# EAGLE board PCB_v186 (EAGLE 9.7.0)
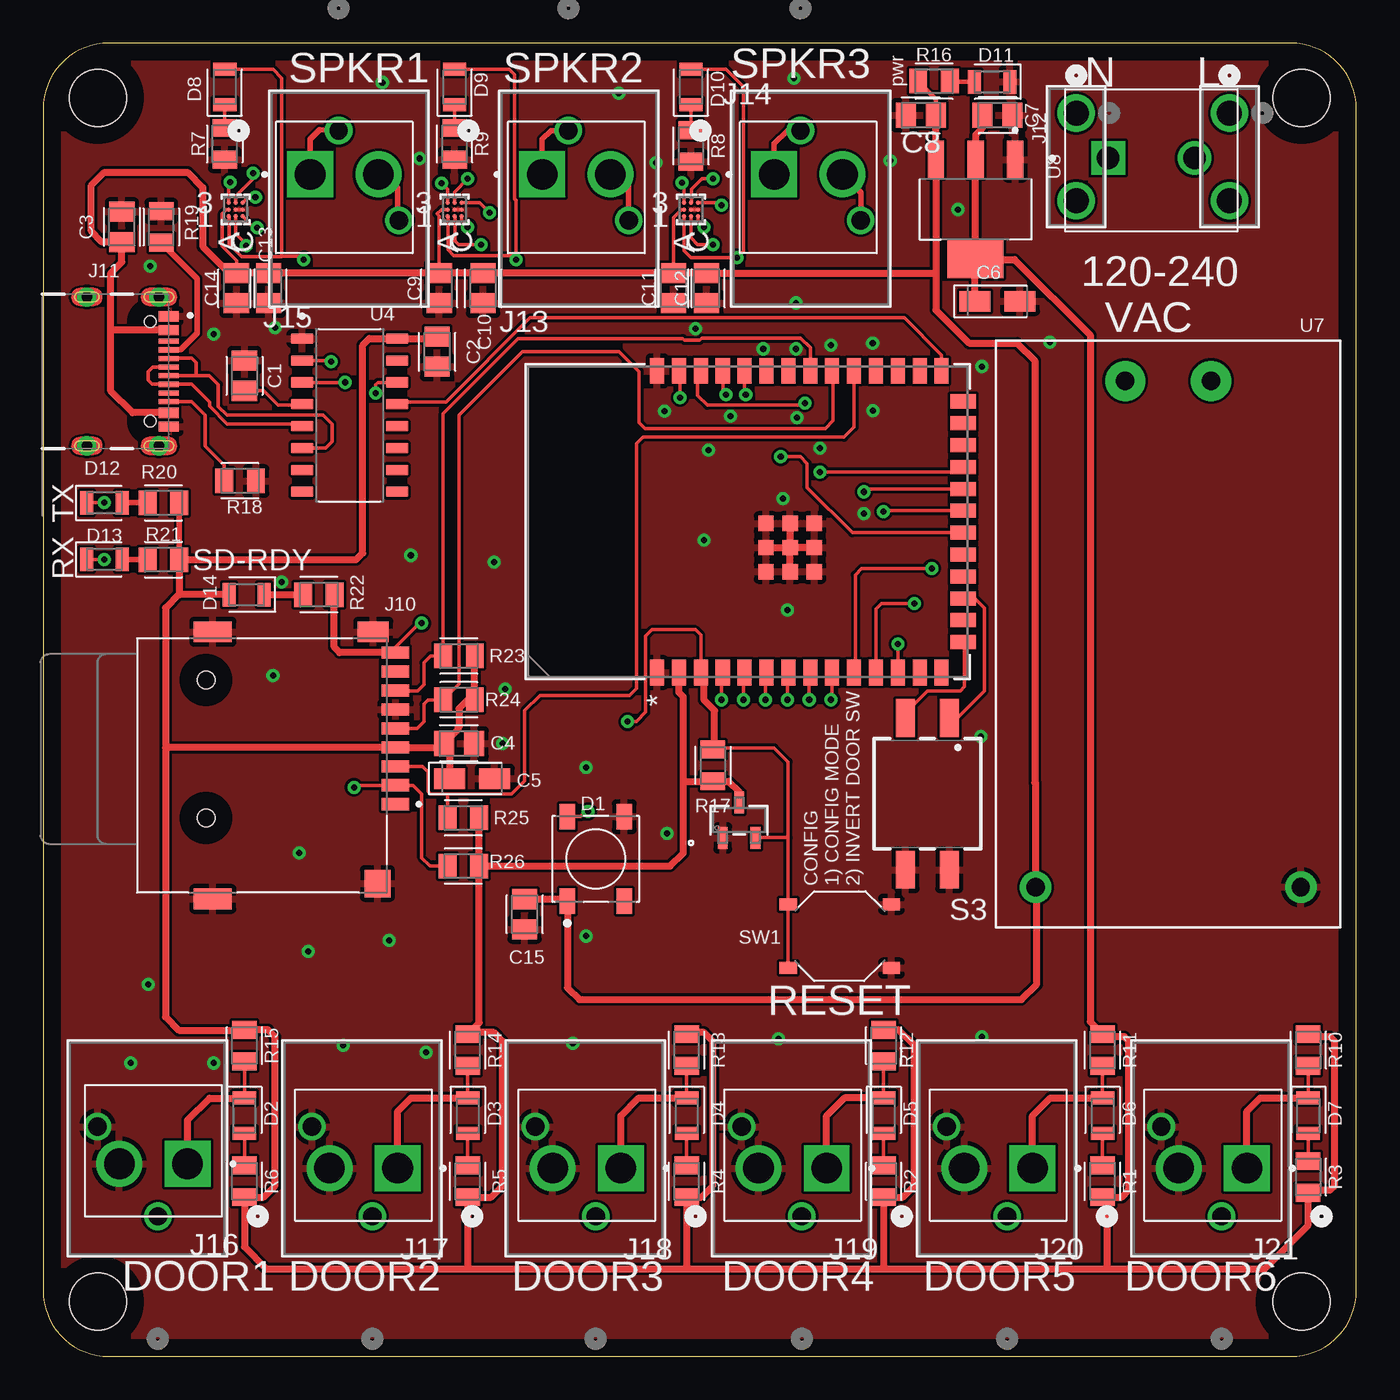
[diagram p0: board, top side]
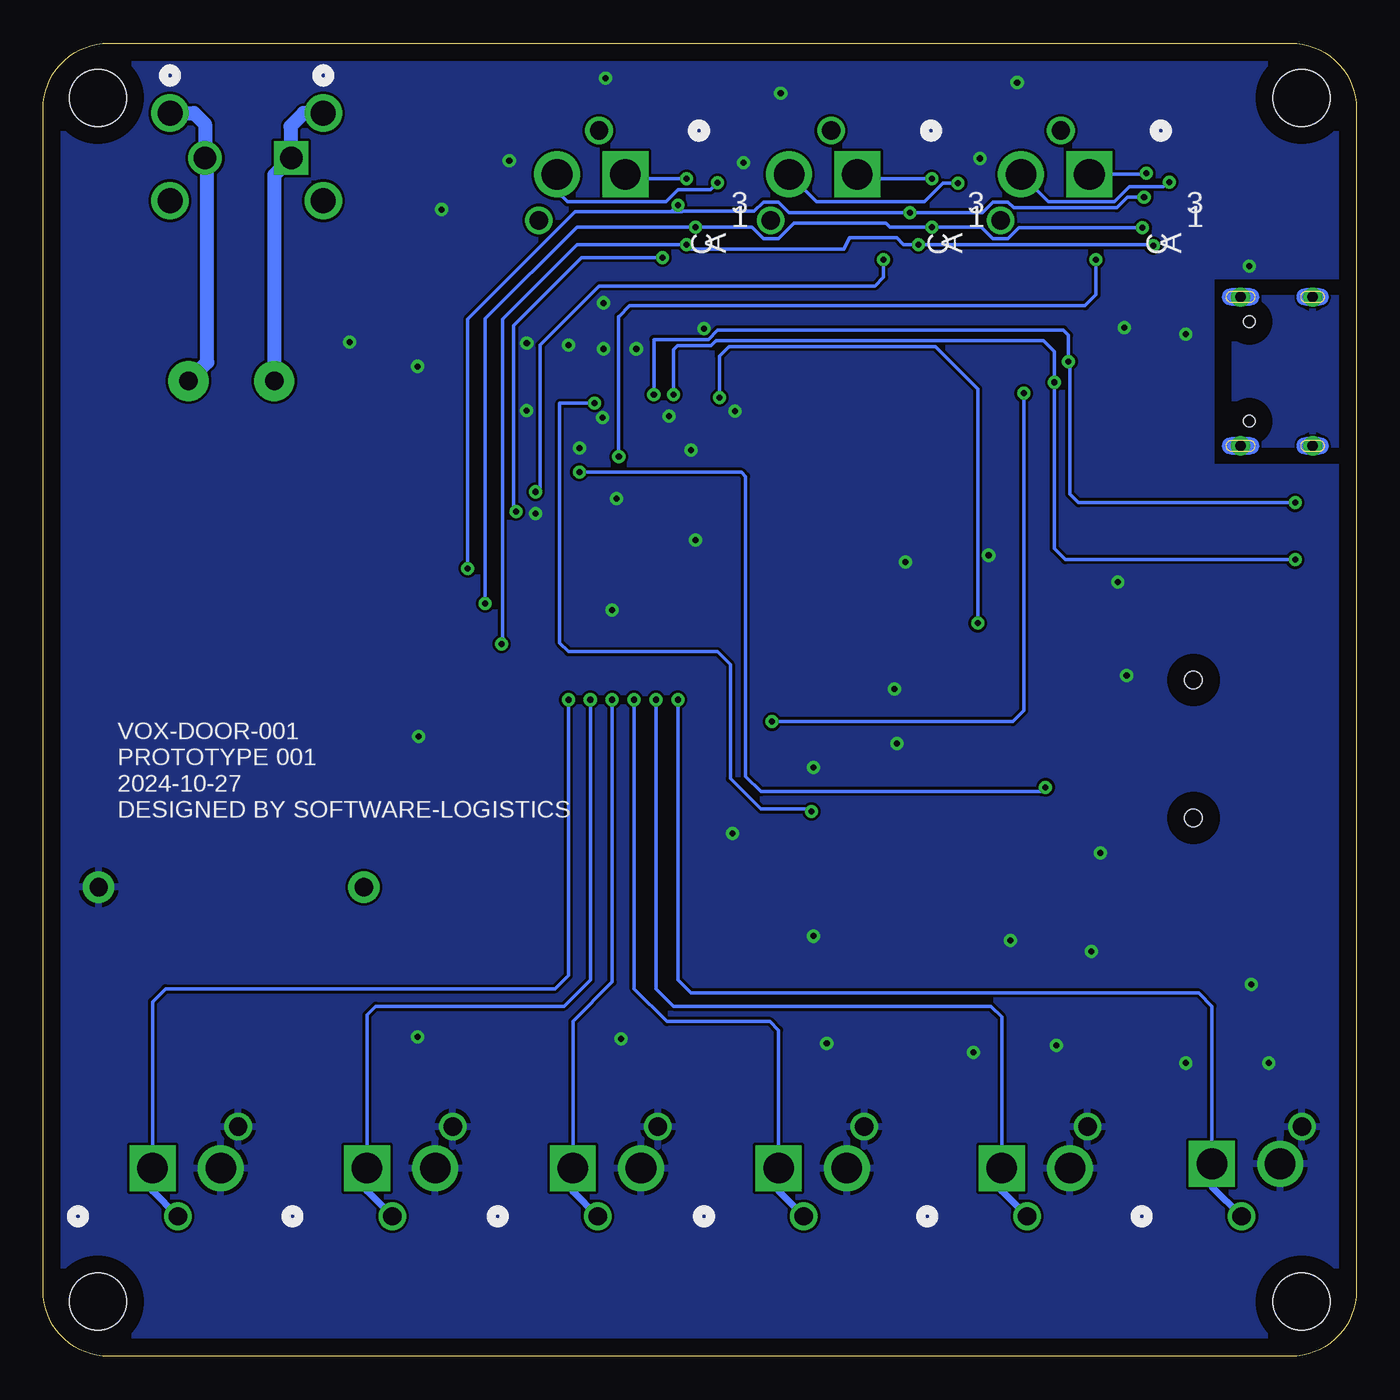
[diagram p1: board, bottom side, seen from below]

Size 76.2 x 76.2 mm. Coordinates in mm from the lower left corner, seen from the top.
Outline: 72.39,76.2 3.81,76.2 arc90 0,72.39 0,3.81 arc90 3.81,0 72.39,0 arc90 76.2,3.81 76.2,72.39 arc90 72.39,76.2
Copper layers (1*16): Top 0.035mm / dielectric 1.5mm / Bottom 0.035mm
Design rules "Fusion Electronics Design Rules": minimum track width 6mil, minimum drill 0.35mm, track to track 6mil, track to pad 6mil, pad to pad 6mil, via to via 6mil, smd to smd 0mil, copper to edge 40mil, drill to drill 6mil, minimum pad ring 10mil, minimum via ring 8mil, stop-mask expansion 4mil, vias tented up to drill 0mil, thermal gap 10mil
Holes 3.3 mm at 3.17,3.17 3.17,73.03 73.03,73.03 73.03,3.17

## Footprints (pad centres in the part's own frame; a part is rotated, then mirrored left to right if it is on the bottom)
CAPC2012X110 = smd 1.165 x 1.465: 1 -0.875,0; 2 0.875,0
CAPMP3216X180N = smd 1.796 x 1.189: 1 -1.31,0; 2 1.31,0
WS2812B = smd 1.5 x 0.9: 1 -2.45,1.65; 2 -2.45,-1.65; 3 2.45,-1.65; 4 2.45,1.65
LEDC2012X110N_FLAT-B = smd 0.762 x 1.362: A 1.025,0; C -1.025,0
LEDC2012X110N_FLAT-R = smd 0.762 x 1.362: A 1.025,0; C -1.025,0
CONN2_1-2834011-2_TEC = drill 1.067 pad 1.575: 1 0,0; 2 3.5,-5.2
CUI_MSD-4-A = smd 0.7 x 1.6: 1 2.25,7.75; 2 1.15,7.75; 3 0.05,7.75; 4 -1.05,7.75; 5 -2.15,7.75; 6 -3.25,7.75; 7 -4.35,7.75; 8 -5.45,7.75; CD -6.55,7.75 | smd 1.2 x 1.8: G1 -7.75,6.45 | smd 1.6 x 1.5: G2 6.85,6.7 | smd 1.2 x 2.2: G3 -7.75,-2.85; G4 7.75,-2.85 | hole 1: -4.95,-3.25; 3.05,-3.25
GCT_USB4105-GF-A = smd 0.6 x 1.15: A1_B12 -3.2,4.755; A4_B9 -2.4,4.755; B1_A12 3.2,4.755; B4_A9 2.4,4.755 | smd 0.3 x 1.15: A5 -1.25,4.755; A6 -0.25,4.755; A7 0.25,4.755; A8 1.25,4.755; B5 1.75,4.755; B6 0.75,4.755; B7 -0.75,4.755; B8 -1.75,4.755 | drill 0.6 pad 1: SH1 -4.32,4.18; SH2 4.32,4.18; SH3 -4.32,0; SH4 4.32,0 | hole 0.65: 2.89,3.68; -2.89,3.68
PHOENIX_1935161 = drill 1.3 square: 1 2.5,4.25 | drill 1.3: 2 7.5,4.25
TE_640445-2 = drill 1.778 pad 2.128 square: 1 0,0 | drill 1.778 pad 2.128: 2 3.96,0
CONN_1217861-1_TEC = drill 1.448 pad 1.956: 1 0,0; 2 5.08,0
RESC2012X65 = smd 1.031 x 1.42: 1 -0.919,0; 2 0.919,0
418121270802 = smd 1.1 x 2.2: 1 -1.27,-4.4; 2 1.27,-4.4; A1 -1.27,4.4; A2 1.27,4.4
SW4-SMD-5.2X5.2X1.5MM = smd 1 x 0.7: 1 -3,1.85; 2 3,1.85; 3 -3,-1.85; 4 3,-1.85
21-0896B_9_MXM = smd 0.254 x 0.254: A1 -0.4,0.4; A2 0,0.4; A3 0.4,0.4; B1 -0.4,0; B2 0,0; B3 0.4,0; C1 -0.4,-0.4; C2 0,-0.4; C3 0.4,-0.4
ESP32-S3-WROOM-1_EXP = smd 1.499 x 0.813: 1 -8.75,5.26; 2 -8.75,3.99; 3 -8.75,2.72; 4 -8.75,1.45; 5 -8.75,0.18; 6 -8.75,-1.09; 7 -8.75,-2.36; 8 -8.75,-3.63; 9 -8.75,-4.9; 10 -8.75,-6.17; 11 -8.75,-7.44; 12 -8.75,-8.71; 13 -8.75,-9.98; 14 -8.75,-11.25; 27 8.75,-11.25; 28 8.75,-9.98; 29 8.75,-8.71; 30 8.75,-7.44; 31 8.75,-6.17; 32 8.75,-4.9; 33 8.75,-3.63; 34 8.75,-2.36; 35 8.75,-1.09; 36 8.75,0.18; 37 8.75,1.45; 38 8.75,2.72; 39 8.75,3.99; 40 8.75,5.26 | smd 0.813 x 1.499: 15 -6.985,-12.5; 16 -5.715,-12.5; 17 -4.445,-12.5; 18 -3.175,-12.5; 19 -1.905,-12.5; 20 -0.635,-12.5; 21 0.635,-12.5; 22 1.905,-12.5; 23 3.175,-12.5; 24 4.445,-12.5; 25 5.715,-12.5; 26 6.985,-12.5 | smd 0.889 x 0.889: 41 -1.5,-2.46; 42 -2.9,-1.06; 43 -2.9,-2.46; 44 -2.9,-3.86; 45 -1.5,-3.86; 46 -0.1,-3.86; 47 -0.1,-2.46; 48 -0.1,-1.06; 49 -1.5,-1.06
21-0051H_MXM = smd 0.559 x 1.295: 1 -0.95,-1.029; 2 0.95,-1.029; 3 0,1.029
SOIC127P600X180-16N = smd 1.31 x 0.62: 1 -2.75,4.445; 2 -2.75,3.175; 3 -2.75,1.905; 4 -2.75,0.635; 5 -2.75,-0.635; 6 -2.75,-1.905; 7 -2.75,-3.175; 8 -2.75,-4.445; 9 2.75,-4.445; 10 2.75,-3.175; 11 2.75,-1.905; 12 2.75,-0.635; 13 2.75,0.635; 14 2.75,1.905; 15 2.75,3.175; 16 2.75,4.445
HLK-PM = drill 1.067 pad 2.337: AC-L -14.681,2.489; AC-N -14.681,-2.489 | drill 1.067 pad 1.829: DC+ 14.681,-7.696; DC- 14.681,7.696
VREG_TLV1117LV33DCYR = smd 2.15 x 0.95: 1 -2.9,2.3; 2 -2.9,0; 3 -2.9,-2.3 | smd 2.15 x 3.25: 4 2.9,0

## Placement (x,y rotation side)
C1  10nF  [CAPC2012X110]  11.68,56.9 90 top
C2  0.1uF  [CAPC2012X110]  22.86,58.29 270 top
C3  0.1uF  [CAPC2012X110]  4.57,65.53 90 top
C4  0.1uF  [CAPC2012X110]  24.13,35.56 0 top
C5  10uF  [CAPMP3216X180N]  24.89,33.53 0 top
C6  10uF  [CAPMP3216X180N]  55.37,61.21 0 top
C7  0.1uF  [CAPC2012X110]  55.37,72.01 0 top
C8  0.1uf  [CAPC2012X110]  50.93,72.01 180 top
C9  0.1uF  [CAPC2012X110]  22.99,61.98 270 top
C10  10uF  [CAPC2012X110]  25.53,61.98 270 top
C11  10uF  [CAPC2012X110]  36.58,61.98 270 top
C12  0.1uF  [CAPC2012X110]  38.49,61.98 270 top
C13  0.1uF  [CAPC2012X110]  13.08,61.98 270 top
C14  10uF  [CAPC2012X110]  11.22,61.98 270 top
C15  0.1uF  [CAPC2012X110]  27.94,25.65 270 top
D1  WS2812B  [WS2812B]  32.07,28.87 90 top
D2  LED_GREEN  [LEDC2012X110N_FLAT-B]  11.68,13.97 270 top
D3  LED_GREEN  [LEDC2012X110N_FLAT-B]  24.64,13.97 270 top
D4  LED_GREEN  [LEDC2012X110N_FLAT-B]  37.34,13.97 270 top
D5  LED_GREEN  [LEDC2012X110N_FLAT-B]  48.77,13.97 270 top
D6  LED_GREEN  [LEDC2012X110N_FLAT-B]  61.47,13.97 270 top
D7  LED_GREEN  [LEDC2012X110N_FLAT-B]  73.41,13.97 270 top
D8  LED_BLUE  [LEDC2012X110N_FLAT-B]  10.54,73.66 90 top
D9  LED_BLUE  [LEDC2012X110N_FLAT-B]  23.88,73.66 90 top
D10  LED_BLUE  [LEDC2012X110N_FLAT-B]  37.59,73.66 90 top
D11  LED_RED  [LEDC2012X110N_FLAT-R]  55.06,73.96 180 top
D12  LED_BLUE  [LEDC2012X110N_FLAT-B]  3.56,49.53 0 top
D13  LED_BLUE  [LEDC2012X110N_FLAT-B]  3.56,46.25 0 top
D14  LED_BLUE  [LEDC2012X110N_FLAT-B]  11.81,44.2 180 top
J1  1-2834011-2CONN2_1-2834011-2_TEC  [CONN2_1-2834011-2_TEC]  6.66,8.13 180 top
J2  1-2834011-2CONN2_1-2834011-2_TEC  [CONN2_1-2834011-2_TEC]  19.1,8.13 180 top
J3  1-2834011-2CONN2_1-2834011-2_TEC  [CONN2_1-2834011-2_TEC]  32.06,8.13 180 top
J4  1-2834011-2CONN2_1-2834011-2_TEC  [CONN2_1-2834011-2_TEC]  44.02,8.13 180 top
J5  1-2834011-2CONN2_1-2834011-2_TEC  [CONN2_1-2834011-2_TEC]  55.93,8.13 180 top
J6  1-2834011-2CONN2_1-2834011-2_TEC  [CONN2_1-2834011-2_TEC]  68.38,8.13 180 top
J7  1-2834011-2CONN2_1-2834011-2_TEC  [CONN2_1-2834011-2_TEC]  17.14,71.12 0 top
J8  1-2834011-2CONN2_1-2834011-2_TEC  [CONN2_1-2834011-2_TEC]  30.48,71.12 0 top
J9  1-2834011-2CONN2_1-2834011-2_TEC  [CONN2_1-2834011-2_TEC]  43.94,71.12 0 top
J10  MSD-4-A  [CUI_MSD-4-A]  12.7,34.29 270 top
J11  USB4105-GF-A  [GCT_USB4105-GF-A]  2.54,57.15 270 top
J12  1935161  [PHOENIX_1935161]  59.3,65.28 0 top
J13  CONN2-0.1  [TE_640445-2]  28.96,68.58 0 top
J14  CONN2-0.1  [TE_640445-2]  42.42,68.58 0 top
J15  CONN2-0.1  [TE_640445-2]  15.49,68.58 0 top
J16  CONN2-0.1  [TE_640445-2]  8.38,11.18 180 top
J17  CONN2-0.1  [TE_640445-2]  20.57,10.92 180 top
J18  CONN2-0.1  [TE_640445-2]  33.53,10.92 180 top
J19  CONN2-0.1  [TE_640445-2]  45.47,10.92 180 top
J20  CONN2-0.1  [TE_640445-2]  57.4,10.92 180 top
J21  CONN2-0.1  [TE_640445-2]  69.85,10.92 180 top
J22  1217861-1CONN_1217861-1_TEC  [CONN_1217861-1_TEC]  68.83,72.14 270 top
J23  1217861-1CONN_1217861-1_TEC  [CONN_1217861-1_TEC]  59.94,72.14 270 top
R1  470  [RESC2012X65]  61.47,10.16 270 top
R2  470  [RESC2012X65]  48.77,10.16 270 top
R3  470  [RESC2012X65]  73.41,10.41 270 top
R4  470  [RESC2012X65]  37.34,10.16 270 top
R5  470  [RESC2012X65]  24.64,10.16 270 top
R6  470  [RESC2012X65]  11.68,10.16 270 top
R7  470  [RESC2012X65]  10.54,70.36 90 top
R8  470  [RESC2012X65]  37.59,70.23 270 top
R9  470  [RESC2012X65]  23.88,70.36 270 top
R10  10K  [RESC2012X65]  73.41,17.78 270 top
R11  10K  [RESC2012X65]  61.47,17.78 270 top
R12  10K  [RESC2012X65]  48.77,18.03 270 top
R13  10K  [RESC2012X65]  37.34,17.78 270 top
R14  10K  [RESC2012X65]  24.64,17.78 270 top
R15  10K  [RESC2012X65]  11.68,18.03 270 top
R16  470  [RESC2012X65]  51.69,73.99 0 top
R17  10K  [RESC2012X65]  38.86,34.29 90 top
R18  5.1K  [RESC2012X65]  11.43,50.8 0 top
R19  5.1K  [RESC2012X65]  6.86,65.53 90 top
R20  470  [RESC2012X65]  6.99,49.53 180 top
R21  470  [RESC2012X65]  6.99,46.23 180 top
R22  470  [RESC2012X65]  16,44.2 0 top
R23  10K  [RESC2012X65]  24.13,40.64 0 top
R24  10K  [RESC2012X65]  24.13,38.1 0 top
R25  10K  [RESC2012X65]  24.38,31.24 0 top
R26  10K  [RESC2012X65]  24.38,28.45 0 top
S3  DIP-SW-2  [418121270802]  51.31,32.64 180 top
SW1  SMD-BUTTON(4P-5.2X5.2X1.5MM-SKQGADE010)-SKQGADE010  [SW4-SMD-5.2X5.2X1.5MM]  46.23,24.38 180 top
U1  MAX98357BEWL+T21-0896B_9_MXM  [21-0896B_9_MXM]  11.18,66.55 90 top
U2  ESP32-S3-WROOM-1-N4R8ESP32-S3-WROOM-1_EXP  [ESP32-S3-WROOM-1_EXP]  40.88,48.43 90 top
U3  MAX809SEUR+T21-0051H_MXM  [21-0051H_MXM]  40.39,31.11 0 top
U4  CH340C  [SOIC127P600X180-16N]  17.78,54.61 0 top
U5  MAX98357BEWL+T21-0896B_9_MXM  [21-0896B_9_MXM]  23.88,66.55 90 top
U6  MAX98357BEWL+T21-0896B_9_MXM  [21-0896B_9_MXM]  37.59,66.55 90 top
U7  HLK-PM  [HLK-PM]  65.28,41.91 270 top
U8  TLV1117LV33DCYR  [VREG_TLV1117LV33DCYR]  54.1,66.55 270 top

## Library data of the parts
C1 = Tinkercad; CATEGORY: Capacitor; COST: 0.0105; DIGIKEY: https://www.digikey.com/en/products/detail/murata-electronics/GRM155R71C103KA01D/587215
C2-C4 C7-C9 C12 C13 C15 = Tinkercad; CATEGORY: Capacitor; COST: 0.0125; DIGIKEY: https://www.digikey.com/en/products/detail/samsung-electro-mechanics/CL05B104KP5NNNC/3886660
C5 C6 = Capacitor; CATEGORY: Capacitor; COST: 0.176; DIGIKEY: https://www.digikey.com/en/products/detail/kemet/T491A106M010AT/818547
C10 C11 C14 = Tinkercad; CATEGORY: Capacitor; COST: 0.03; DIGIKEY: https://www.digikey.com/en/products/detail/samsung-electro-mechanics/CL21A106KOQNNNE/3886754
D1 = LED; CATEGORY: LED; COLOR: RGB; COST: 0.6; DESCRIPTION: LED integrated light source; DIGIKEY: https://www.digikey.com/en/products/detail/sparkfun-electronics/COM-16347/11630204; MANUFACTURER: Worldsemi; MPN: WS2812B; OPERATING_TEMP: -25 ℃ to +80℃(TJ); PART_STATUS: Active; SUB_CATEGORY: RGB
D2-D10 D12-D14 = LED; CATEGORY: LED; COLOR: BLUE; COST: 0.08; DESCRIPTION: CHIP LED FLAT; DIGIKEY: https://www.digikey.com/en/products/detail/liteon/LTST-C171TBKT/388528; SUB-CATEGORY: CHIP; TYPE: FLAT_TOP
D11 = LED; CATEGORY: LED; COLOR: RED; COST: 0.12; DESCRIPTION: CHIP LED FLAT; DIGIKEY: https://www.digikey.com/en/products/detail/w%C3%BCrth-elektronik/150060SS75000/4489903; SUB-CATEGORY: CHIP; TYPE: FLAT_TOP
J1 J2 J5-J9 = conn2-spring; COPYRIGHT: Copyright (C) 2024 Ultra Librarian. All rights reserved.; COST: 0.2352; DIGIKEY: https://www.digikey.com/en/products/detail/te-connectivity-amp-connectors/1-2834011-2/5872964; MANUFACTURER_PART_NUMBER: 1-2834011-2; MFR_NAME: TE Connectivity
J3 J4 = conn2-spring; COPYRIGHT: Copyright (C) 2024 Ultra Librarian. All rights reserved.; COST: 0.23520; DIGIKEY: https://www.digikey.com/en/products/detail/te-connectivity-amp-connectors/1-2834011-2/5872964; MANUFACTURER_PART_NUMBER: 1-2834011-2; MFR_NAME: TE Connectivity
J10 = micro-sd; COST: 0.25; DIGIKEY: https://www.digikey.com/en/products/detail/same-sky-formerly-cui-devices/MSD-4-A/21796808; MANUFACTURER: CUI Devices; MAXIMUM_PACKAGE_HEIGHT: 2.00mm; PARTREV: 1.0; STANDARD: Manufacturer Recommendations
J11 = USB-C; CHECK_PRICES: https://www.snapeda.com/parts/USB4105-GF-A/Global+Connector+Technology/view-part/?ref=eda; COST: 0.05; DESCRIPTION: USB-C (USB TYPE-C) USB 2.0 Receptacle Connector 24 (16+8 Dummy) Position Surface Mount, Right Angle; Through Hole; DIGIKEY: N/A; DIGIKEY_PART_NUMBER: 2073-USB4105-GF-ATR-ND; MF: GCT; MP: USB4105-GF-A; PACKAGE: None; PURCHASE-URL: https://www.snapeda.com/api/url_track_click_mouser/?unipart_id=4423780&manufacturer=GCT&part_name=USB4105-GF-A&search_term=usb4105-gf-a; SNAPEDA_LINK: https://www.snapeda.com/parts/USB4105-GF-A/Global+Connector+Technology/view-part/?ref=snap
J12 = CONN2-5MM; CHECK_PRICES: https://www.snapeda.com/parts/1935161/Phoenix+Contact/view-part/?ref=eda; COST: 0.3738; DESCRIPTION: PCB Terminal Screw 5mm 16AWG 400V 17.5A 2 Position COMBICON PT Series | Phoenix Contact 1935161; DIGIKEY: https://www.digikey.com/en/products/detail/phoenix-contact/1935161/568614?s=N4IgTCBcDaIIwE4DMBWOA2OIC6BfIA; DIGIKEY_PART_NUMBER: 277-1667-ND; MF: Phoenix Contact; MP: 1935161; PACKAGE: None; PURCHASE-URL: https://www.snapeda.com/api/url_track_click_mouser/?unipart_id=423515&manufacturer=Phoenix Contact&part_name=1935161&search_term=None; SNAPEDA_LINK: https://www.snapeda.com/parts/1935161/Phoenix+Contact/view-part/?ref=snap
J13-J21 = CONN2-0.1; AVAILABILITY: In Stock; CENTERLINE_PITCH: 3.96 mm[.156 in]; COMMENT: 640445-2; COST: 0.1016; DESCRIPTION: Connector MTA-156 Male 2 Copper Alloy 7 600 0.156 in. Polyester White | TE Connectivity 640445-2; DIGIKEY: https://www.digikey.com/en/products/detail/te-connectivity-amp-connectors/640445-2/109093; EU_ROHS_COMPLIANCE: Compliant; MF: TE Connectivity; MP: 640445-2; NUMBER_OF_POSITIONS: 2; PACKAGE: None; PRICE: None; PRODUCT_TYPE: Header
J22 J23 = CONN-SPADE-0.25; COPYRIGHT: Copyright (C) 2024 Ultra Librarian. All rights reserved.; COST: 0.0629; DIGIKEY: https://www.digikey.com/en/products/detail/te-connectivity-amp-connectors/1217861-1/1148769; MANUFACTURER_PART_NUMBER: 1217861-1; MFR_NAME: TE Connectivity
R1-R26 = Tutorial - Fusion 360; CATEGORY: Resistor; COST: 0.008; DIGIKEY: https://www.digikey.com/en/products/detail/te-connectivity-passive-product/CRGCQ0805J470R/8576734; SUB-CATEGORY: Fixed
S3 = DIP-2; AVAILABILITY: In Stock; CHECK_PRICES: https://www.snapeda.com/parts/418121270802/Wurth+Elektronik/view-part/?ref=eda; COST: 0.44; DESCRIPTION: Dip Switch SPST 2 Position Surface Mount Slide (Standard) Actuator 25mA 24VDC; DIGIKEY: https://www.digikey.com/en/products/detail/cts-electrocomponents/219-2LPST/223163; MF: Würth Elektronik; MP: 418121270802; PACKAGE: None; PRICE: None; SNAPEDA_LINK: https://www.snapeda.com/parts/418121270802/Wurth+Elektronik/view-part/?ref=snap
SW1 = SMD-BUTTON_4P-5.2X5.2X1.5MM-SKQGADE010_; AVAILABILITY: In Stock; CHECK_PRICES: https://www.snapeda.com/parts/SKQGADE010/ALPS/view-part/?ref=eda; COST: 0.47; DESCRIPTION: Switch Tactile N.O. SPST Round Button Gull Wing 0.05A 12VDC 2.55N SMD T/R; DIGIKEY: https://www.digikey.com/en/products/detail/alps-alpine/SKQGADE010/18109115; MF: ALPS; MP: SKQGADE010; PACKAGE: SMD-4 ALPS; PRICE: None; SNAPEDA_LINK: https://www.snapeda.com/parts/SKQGADE010/ALPS/view-part/?ref=snap
U1 U5 U6 = MAX98357; COPYRIGHT: Copyright (C) 2024 Ultra Librarian. All rights reserved.; COST: 2.03; DIGIKEY: https://www.digikey.com/en/products/detail/analog-devices-inc-maxim-integrated/max98357bewl-t/4271384; MANUFACTURER_PART_NUMBER: MAX98357BEWL+T; MFR_NAME: Analog Devices / Maxim Integrated
U2 = ESP32S3WROOM1N4R8; COPYRIGHT: Copyright (C) 2024 Ultra Librarian. All rights reserved.; COST: 3.62; DIGIKEY: https://www.digikey.com/en/products/detail/espressif-systems/ESP32-S3-WROOM-1-N16R2/16162644; MANUFACTURER_PART_NUMBER: ESP32-S3-WROOM-1-N4R8; MFR_NAME: Espressif Systems
U3 = MAX809SE; COPYRIGHT: Copyright (C) 2024 Ultra Librarian. All rights reserved.; COST: 0.35; DIGIKEY: https://www.digikey.com/en/products/detail/microchip-technology/TCM809RVNB713/442937; MANUFACTURER_PART_NUMBER: MAX809SEUR+T; MFR_NAME: Analog Devices / Maxim Integrated
U4 = CH340C; CHECK_PRICES: https://www.snapeda.com/parts/CH340C/WCH/view-part/?ref=eda; COST: 0.29; DESCRIPTION: USB to serial chip CH340; DIGIKEY: NA; MF: WCH; MP: CH340C; PACKAGE: None; SNAPEDA_LINK: https://www.snapeda.com/parts/CH340C/WCH/view-part/?ref=snap
U7 = CustomComponents; COST: 3.33; WEBLINK: https://www.hlktech.net/index.php?id=105
U8 = VREG-3.3V; AVAILABILITY: In Stock; CHECK_PRICES: https://www.snapeda.com/parts/TLV1117LV33DCYR/Texas+Instruments/view-part/?ref=eda; COST: 0.10; DESCRIPTION: 1-A, low-dropout voltage regulator; DIGIKEY: https://www.digikey.com/en/products/detail/texas-instruments/TLV1117LV33DCYR/2666508; MF: Texas Instruments; MP: TLV1117LV33DCYR; PACKAGE: SOT-223-4 Texas Instruments; PRICE: None; SNAPEDA_LINK: https://www.snapeda.com/parts/TLV1117LV33DCYR/Texas+Instruments/view-part/?ref=snap

## Nets
+3.3V: C2.1 C4.1 C5.1 C6.1 C7.1 D14.A J10.4 R1.2 R2.2 R3.2 R4.2 R5.2 R6.2 R10.1 R11.1 R12.1 R13.1 R14.1 R15.1 R17.1 R20.1 R21.1 R23.2 R24.2 R25.2 R26.2 U2.2 U3.3 U4.16 U8.2 U8.4
+5V: C3.1 C8.1 C9.1 C10.1 C11.1 C12.1 C13.1 C14.1 C15.1 D1.1 J11.A4_B9 J11.B4_A9 R16.1 U1.A2 U5.A2 U6.A2 U7.DC+ U8.3
AUDIO_OUT1: D8.A U1.A1 U2.20
AUDIO_OUT2: D9.A U2.22 U5.A1
AUDIO_OUT3: D10.A U2.21 U6.A1
BOOT: U2.27 U4.13
CONFIG_MODE: S3.2 U2.15
D+: J11.A6 J11.B6 U4.5
D-: J11.A7 J11.B7 U4.6
DOOR1: D2.C J1.1 J16.1 R15.2 U2.4
DOOR2: D3.C J2.1 J17.1 R14.2 U2.5
DOOR3: D4.C J3.1 J18.1 R13.2 U2.6
DOOR4: D5.C J4.1 J19.1 R12.2 U2.7
DOOR5: D6.C J5.1 J20.1 R11.2 U2.8
DOOR6: D7.C J6.1 J21.1 R10.2 U2.9
FROM_USB: D12.C U2.36 U4.2
GND: C1.2 C2.2 C3.2 C4.2 C5.2 C6.2 C7.2 C8.2 C9.2 C10.2 C11.2 C12.2 C13.2 C14.2 C15.2 D1.3 D11.C J1.2 J2.2 J3.2 J4.2 J5.2 J6.2 J10.6 J10.G1 J10.G2 J10.G3 J10.G4 J11.A1_B12 J11.B1_A12 J16.2 J17.2 J18.2 J19.2 J20.2 J21.2 R7.1 R8.2 R9.2 R18.2 R19.2 S3.A1 S3.A2 SW1.1 SW1.3 U1.B2 U1.C2 U2.1 U2.40 U2.41 U2.42 U2.43 U2.44 U2.45 U2.46 U2.47 U2.48 U2.49 U3.1 U4.1 U5.B2 U5.C2 U6.B2 U6.C2 U7.DC- U8.1
I2S_CLCK_A: U1.C1 U2.11 U5.C1 U6.C1
I2S_DAT_A: U1.B1 U2.12 U5.B1 U6.B1
I2S_LRC_A: U1.C3 U2.10 U5.C3 U6.C3
INVERT_DOOR_SIGNAL: S3.1 U2.17
N$1: D11.A R16.2
N$2: D12.A R20.2
N$3: D13.A R21.2
N$4: J11.B5 R18.1
N$5: J12.1 J23.1 U7.AC-N
N$6: J12.2 J22.1 U7.AC-L
N$7: J11.A5 R19.1
N$8: D8.C R7.2
N$9: D9.C R9.1
N$11: D7.A R3.1
N$12: D6.A R1.1
N$13: D5.A R2.1
N$14: D4.A R4.1
N$15: D3.A R5.1
N$16: D2.A R6.1
N$18: D10.C R8.1
N$21: J9.1 J14.1 U6.B3
N$22: J8.1 J13.1 U5.B3
N$23: J8.2 J13.2 U5.A3
N$24: J9.2 J14.2 U6.A3
N$26: C1.1 U4.4
N$27: D14.C R22.1
OUTN: J7.1 J15.1 U1.B3
OUTP: J7.2 J15.2 U1.A3
RESET: R17.2 SW1.2 SW1.4 U2.3 U3.2 U4.14
RGB_LED: D1.4 U2.38
SD_CS: J10.2 R26.1 U2.23
SD_IN: J10.CD R22.2 U2.39
SD_MISO: J10.7 R23.1 U2.33
SD_MOSI: J10.3 R25.1 U2.31
SD_SCK: J10.5 R24.1 U2.32
SHELL_GND: J11.SH1 J11.SH2 J11.SH3 J11.SH4
TO_USB: D13.C U2.37 U4.3

## Tracks (layer width: path | path; a pad name or v marks a point on that pad's centre or on a via)
+3.3V
  Top 0.203: 37.43,18.7 R13.1 | R5.2 24.64,9.11
  Top 0.305: R21.1 R20.1
  Top 0.406: 37.15,33.27 37.15,29.21 36.39,28.45 R26.2 | R26.2 R25.2 | C4.1 23.58,35.23 C5.1 | C4.1 23.04,35.34 J10.4 7.14,35.34 7.1,35.31 | C4.1 24.07,36.37 24.07,36.44 24.13,36.5 24.13,37.59 24.64,38.1 R24.2 R23.2 | U8.4 54.14,63.61 54.06,63.53 C6.1 | 37.15,33.27 37.24,33.37 R17.1 39.78,33.37 40.39,32.77 U3.3 | C2.1 22.55,58.86 22.52,58.86 22.33,59.05 U4.16 18.92,59.05 18.54,58.67 18.54,46.61 18.16,46.23 R21.1 7.9,44.23 | C7.1 54.5,71.26 54.1,70.87 U8.2 U8.4 | 24.64,5.08 12.95,5.08 11.68,6.35 R6.2 12.8,9.24 13.46,9.91 13.46,18.54 13.05,18.95 12.06,18.95 | 24.64,5.08 37.34,5.08 | 37.34,5.08 48.77,5.08 | 48.77,5.08 61.72,5.08 | 48.77,5.08 R2.2 49.88,9.24 50.55,9.91 50.55,18.03 49.63,18.95 R12.1 | 37.34,5.08 R4.2 38.2,9.24 38.86,9.91 38.86,18.29 38.35,18.8 37.53,18.8 37.43,18.7 | 24.64,5.08 R5.2 26,9.24 26.67,9.91 26.67,18.29 26.16,18.8 24.73,18.8 R14.1 25.3,19.36 R26.2 | 61.72,5.08 61.72,8.99 R1.2 62.58,9.24 62.99,9.65 62.99,18.29 62.74,18.54 61.63,18.54 R11.1 60.76,19.41 60.76,59.26 56.37,63.65 U8.4 | 12.06,18.95 R15.1 | R10.1 73.56,18.54 74.68,18.54 74.93,18.29 74.93,9.91 74.68,9.65 73.56,9.65 R3.2 73.41,7.62 70.87,5.08 61.72,5.08 | 7.1,35.31 7.1,43.42 7.9,44.23 | U2.2 36.89,38.52 37.15,38.27 37.15,33.27 | D14.A 7.93,44.2 7.9,44.23 | 7.1,35.31 7.1,19.69 7.87,18.92 12.03,18.92 12.06,18.95
+5V
  Top 0.203: U5.A2 23.11,66.55 22.86,66.29 22.99,66.17 C9.1 | U6.A2 37.17,66.53 37.03,66.53 36.58,66.07 C11.1 | C14.1 11.22,63.58 10.39,64.41 10.39,66.31 10.62,66.53 10.76,66.53 U1.A2
  Top 0.254: C8.1 51.8,72.96 R16.1
  Top 0.406: J11.B4_A9 5.19,54.75 3.94,56.01 3.94,59.56 | C8.1 U8.3 51.8,62.87 | C8.1 | 51.8,62.87 51.8,60.72 53.72,58.8 56.52,58.8 57.53,57.78 57.53,33.27 57.58,33.27 U7.DC+ 57.66,27.15 57.66,21.59 56.77,20.7 31.11,20.7 30.42,21.39 D1.1 30.31,26.53 C15.1 | 51.8,62.87 51.79,62.85 C12.1 C11.1 C10.1 C9.1 C13.1 C14.1 10.81,62.85 9.27,64.39 9.27,67.82 8.38,68.71 3.56,68.71 2.79,67.94 2.79,65.28 3.42,64.66 C3.1 4.57,63.5 3.94,62.87 3.94,59.56 | J11.A4_B9 3.95,59.55 3.94,59.56
AUDIO_OUT1  (via drill 0.35)
  Top 0.203: U1.A1 10.79,66.13 10.79,64.55 11.53,63.81 13.84,63.81 13.84,63.85 | U2.20 46.95,47.79 44.32,50.42 44.32,51.82 43.94,52.2 v42.8,52.2 | 13.84,63.85 14.89,63.85 v15.11,63.63 | 13.84,63.85 13.84,74.17 13.34,74.68 10.55,74.68 D8.A
  Bottom 0.203: v15.11,63.63 15.11,61.59 15.75,60.96 42.16,60.96 42.78,60.34 42.8,60.34 v42.8,52.2
AUDIO_OUT2  (via drill 0.35)
  Top 0.203: U5.A1 23.5,66.13 23.5,64.21 23.83,63.88 27.43,63.88 v27.43,63.62 27.43,67.08 27.37,67.14 27.37,74.36 27.05,74.68 27.05,74.69 D9.A | U2.22 47.62,50.33 v47.62,50.16
  Bottom 0.203: v27.43,63.62 27.43,62.61 27.94,62.1 43.94,62.1 47.37,58.67 47.37,50.42 v47.62,50.16
AUDIO_OUT3  (via drill 0.35)
  Top 0.203: U2.21 48.81,49.06 v48.77,49.02 | D10.A 39.62,74.69 40.64,73.66 40.64,64.14 v40.26,63.75 37.59,63.75 37.19,64.15 U6.A1
  Bottom 0.203: v48.77,49.02 48.9,49.15 48.9,59.82 44.96,63.75 v40.26,63.75
BOOT
  Top 0.203: U2.27 52.13,58.1 49.97,60.26 28.27,60.26 23.37,55.37 20.66,55.37 U4.13
CONFIG_MODE
  Top 0.203: S3.2 50.04,37.34 51.31,38.61 53.21,38.61 53.47,38.86 53.47,41.36 U2.15
D+
  Top 0.203: U4.5 14.9,54.1 10.67,54.1 9.65,55.12 9.65,55.37 8.62,56.4 J11.B6 6.34,56.4 6.1,56.64 6.1,57.15 6.35,57.4 J11.A6
D-
  Top 0.203: U4.6 16.38,52.7 16.76,53.09 16.76,54.1 16.26,54.61 10.67,54.61 10.16,55.12 10.16,56.39 9.65,56.9 8.89,56.9 | J11.A7 8.89,56.9 | J11.B7 7.31,57.91 8.64,57.91 8.89,57.66 8.89,56.9
DOOR1  (via drill 0.35)
  Top 0.203: R15.2 D2.C 11.68,14.99 | v39.37,38.1 39.37,39.61 U2.4
  Top 0.406: J16.1 8.38,13.72 9.65,14.99 11.68,14.99
  Bottom 0.203: J16.1 8.38,20.32 9.14,21.08 38.61,21.08 39.37,21.84 v39.37,38.1
  Bottom 0.406: J1.1 8.38,9.85 J16.1
DOOR2  (via drill 0.35)
  Top 0.203: R14.2 D3.C | v40.64,38.1 40.64,39.61 U2.5
  Top 0.406: J17.1 20.57,14.22 21.34,14.99 D3.C
  Bottom 0.203: J17.1 20.57,19.68 21.21,20.32 39.62,20.32 40.64,21.34 v40.64,38.1
  Bottom 0.406: J2.1 20.57,9.6 J17.1
DOOR3  (via drill 0.35)
  Top 0.203: R13.2 D4.C | v41.91,38.1 41.91,39.61 U2.6
  Top 0.406: J18.1 33.53,13.97 34.55,14.99 D4.C
  Bottom 0.203: J18.1 33.53,18.92 34.04,19.43 40.01,19.43 41.91,21.34 v41.91,38.1
  Bottom 0.406: J3.1 33.53,9.6 J18.1
DOOR4  (via drill 0.35)
  Top 0.203: R12.2 D5.C | v43.18,38.1 43.18,39.61 U2.7
  Top 0.406: J19.1 45.47,13.97 46.49,14.99 D5.C
  Bottom 0.203: J19.1 45.47,19.43 43.18,21.72 v43.18,38.1
  Bottom 0.406: J4.1 45.47,9.57 J19.1
DOOR5  (via drill 0.35)
  Top 0.203: D6.C R11.2 | v44.45,38.1 44.45,39.61 U2.8
  Top 0.406: J20.1 57.4,13.97 58.43,14.99 D6.C
  Bottom 0.203: J20.1 57.4,19.81 56.9,20.32 45.97,20.32 44.45,21.84 v44.45,38.1
  Bottom 0.406: J5.1 57.4,9.6 J20.1
DOOR6  (via drill 0.35)
  Top 0.203: R10.2 D7.C | v45.72,38.1 45.78,38.16 U2.9
  Top 0.406: J21.1 69.85,14.22 70.62,14.99 D7.C
  Bottom 0.203: J21.1 69.85,20.57 69.09,21.34 46.48,21.34 45.72,22.1 v45.72,38.1
  Bottom 0.406: J6.1 69.85,9.6 J21.1
FROM_USB  (via drill 0.35)
  Top 0.203: D12.C v3.56,49.53 | U4.2 16.51,57.78 16.64,57.66 v16.7,57.72 | U2.36 40.7,55.88 v40.77,55.81
  Bottom 0.203: v3.56,49.53 16.13,49.53 16.64,50.04 16.64,57.66 v16.7,57.72 16.7,59.24 17,59.55 37.06,59.55 37.6,59 40.77,59 v40.77,55.81
GND  (via drill 0.35)
  Top 0.203: 13.08,60.92 C13.2 | U1.C2 U1.B2 | U5.C2 U5.B2 | U6.C2 U6.B2
  Top 0.406: U2.43 U2.41 | U2.45 U2.41 | U2.47 U2.41 | U2.49 U2.41
  other vias: 13.34,39.5 38.35,47.37 36.2,30.35 14.86,29.21 33.4,73.28 19.68,73.91 43.56,74.17 26.67,35.56 26.16,46.1 6.22,63.25 9.91,59.31 13.46,59.69 47.62,48.9 45.72,58.67 48.13,58.8 41.78,58.46 43.69,58.46 43.69,61.12 54.48,57.44 58.42,58.84 35.56,69.25 21.84,69.51 49.15,69.38 31.5,24.38 31.5,34.16 26.8,38.73 43.18,43.31 42.93,49.78 38.61,52.58 30.73,18.16 42.67,18.41 54.48,18.54 22.23,17.65 17.4,18.03 9.91,17.02 5.08,17.02 6.1,21.59 15.37,23.5 20.07,24.13 54.42,35.98 13.84,44.93 45.09,52.7 39.88,54.55 43.74,54.48 53.09,66.55 21.34,46.48 36.06,54.86 48.14,54.86 37.87,59.63
  pour Bottom: 8.43,51.7 8.37,51.64 8.3,51.61 -0.43,51.61 -1.06,-1.07 77.39,-1.07 77.39,77.01 0.08,77.01 0.08,62.69 8.3,62.69 8.37,62.66 8.43,62.6 8.46,62.52 8.46,51.78
  pour Top: -1.76,-1.79 78.1,-1.79 78.1,77.78 -1.76,77.78
I2S_CLCK_A  (via drill 0.35)
  Top 0.203: U2.11 48.32,43.37 48.64,43.69 v50.55,43.69 | U1.C1 12.08,65.64 12.34,65.64 12.41,65.57 v12.41,65.49 | v24.64,65.53 24.28,65.89 U5.C1 | v38.35,65.52 37.99,65.88 U6.C1
  Bottom 0.203: v50.55,43.69 50.55,60.2 45.22,65.53 38.35,65.53 | 38.35,65.53 35.08,65.53 34.42,64.87 33.54,64.87 32.65,65.76 27.29,65.76 27.05,65.53 v24.64,65.53 21.75,65.53 21.08,64.87 20.21,64.87 19.58,65.49 v12.41,65.49 | v38.35,65.52 38.35,65.53
I2S_DAT_A  (via drill 0.35)
  Top 0.203: U5.B1 23.89,66.13 23.89,64.72 24.1,64.52 v25.4,64.52 v25.41,64.51 | v38.86,64.52 37.97,64.52 37.59,64.9 U6.B1 | U2.12 v49.59,41.32 v49.6,41.33 | U1.B1 11.18,65.15 11.79,64.53 v11.79,64.44
  Bottom 0.203: 38.85,64.51 45.22,64.51 49.53,60.2 49.53,41.4 v49.6,41.33 | 38.85,64.51 38.6,64.25 29.73,64.25 29.4,64.9 26.67,64.9 26.28,64.51 v25.41,64.51 11.86,64.51 v11.79,64.44 | 38.85,64.51 v38.86,64.52
I2S_LRC_A  (via drill 0.35)
  Top 0.203: U5.C3 25.32,66.95 v25.91,66.36 | U1.C3 11.83,67.2 12.27,67.2 v12.32,67.25 | U2.10 47.12,39.74 47.12,45.35 47.49,45.72 v51.56,45.72 | U6.C3 39.22,66.95 v39.36,66.81
  Bottom 0.203: v51.56,45.72 51.56,60.18 45.32,66.42 39.14,66.42 39.12,66.44 | 39.12,66.44 34.95,66.44 34.42,66.97 33.54,66.97 32.93,66.36 v25.91,66.36 21.7,66.36 21.08,66.97 20.21,66.97 19.87,66.64 13.91,66.64 13.3,67.25 v12.32,67.25 | 39.12,66.44 39.73,66.44 v39.36,66.81
INVERT_DOOR_SIGNAL
  Top 0.203: S3.1 53.04,37.04 54.61,38.61 54.61,43.43 54.06,43.98 U2.17
N$1
  Top 0.254: D11.A 52.64,73.96 R16.2
N$2
  Top 0.305: R20.2 D12.A
N$3
  Top 0.305: D13.A 6.05,46.25 R21.2
N$4
  Top 0.203: J11.B5 8.61,55.4 9.4,54.61 9.4,52.83 10.51,51.72 R18.1
N$5
  Bottom 0.813: J23.1 61.09,72.14 61.85,71.37 61.85,69.57 J12.1 62.79,68.54 U7.AC-N
N$6
  Bottom 0.813: J22.1 67.44,72.14 66.8,71.5 J12.2 66.67,69.4 66.67,57.68 U7.AC-L
N$7
  Top 0.305: J11.A5 7.32,58.42 7.97,58.42 8.94,59.39 8.94,62.53 R19.1
N$8
  Top 0.203: D8.C R7.2
N$9
  Top 0.203: R9.1 D9.C
N$11
  Top 0.203: D7.A R3.1
N$12
  Top 0.203: R1.1 D6.A
N$13
  Top 0.203: R2.1 D5.A
N$14
  Top 0.203: D4.A R4.1
N$15
  Top 0.203: D3.A R5.1
N$16
  Top 0.203: D2.A R6.1
N$18
  Top 0.203: R8.1 D10.C
N$21  (via drill 0.35)
  Top 0.203: v38.86,68.33 38.23,68.33 37.61,67.71 37.61,66.97 U6.B3
  Top 0.305: J14.1 42.42,70.36 43.18,71.12 J9.1
  Bottom 0.203: v38.86,68.33 42.16,68.33 J14.1
N$22  (via drill 0.35)
  Top 0.203: U5.B3 23.88,67.56 v24.64,68.33
  Top 0.305: J8.1 29.46,71.12 28.96,70.61 J13.1
  Bottom 0.203: v24.64,68.33 28.7,68.33 J13.1
N$23  (via drill 0.35)
  Top 0.203: v23.11,68.07 23.48,67.71 U5.A3
  Top 0.305: J13.2 33.53,68.58 33.98,68.13 J8.2
  Bottom 0.203: J13.2 31.33,66.99 25.08,66.99 24,68.07 v23.11,68.07
N$24  (via drill 0.35)
  Top 0.203: U6.A3 37.19,67.96 v37.07,68.09
  Top 0.305: J9.2 47.44,67.52 J14.2
  Bottom 0.203: J14.2 46.35,68.56 46.35,67.56 45.78,66.99 40.07,66.99 39.37,67.69 37.46,67.69 v37.07,68.09
N$26
  Top 0.203: C1.1 12.81,56.02 13.63,55.2 14.99,55.2
  Top 0.305: 14.99,55.2 U4.4
N$27
  Top 0.406: D14.C R22.1
OUTN  (via drill 0.35)
  Top 0.203: U1.B3 11.18,67.31 12.51,68.65 v12.19,68.65
  Top 0.305: J15.1 15.49,70.61 16.05,71.17 J7.1
  Bottom 0.203: v12.19,68.65 12.26,68.58 J15.1
OUTP  (via drill 0.35)
  Top 0.203: U1.A3 10.78,68.14 v10.86,68.14
  Top 0.305: J15.2 19.81,68.58 20.57,67.82 20.57,66.05 J7.2
  Bottom 0.203: v10.86,68.14 10.95,68.14 11.21,67.88 13.17,67.88 14.05,66.99 17.87,66.99 J15.2
RESET  (via drill 0.35)
  Top 0.203: SW1.2 SW1.4 43.23,30.1 | R17.2 38.96,35.31 42.42,35.31 43.23,34.5 43.23,30.1 | U4.14 19.43,56.52 19.3,56.39 v19.3,55.88 | U2.3 38.16,41.85 37.85,42.16 35.33,42.16 34.96,41.8 34.96,37.38 34.42,36.83 v33.91,36.83 | U3.2 43.23,30.1
  Top 0.406: U2.3 38.35,39.49 38.35,38.08 38.96,37.47 38.96,35.31 R17.2
  Bottom 0.203: v19.3,55.88 19.3,37.47 19.94,36.83 v33.91,36.83
RGB_LED  (via drill 0.35)
  Top 0.203: U2.38 37.97,56.99 37.97,55.75 38.54,55.18 44.07,55.18 v44.19,55.31 | v31.62,31.62 31.5,31.62 31.19,31.32 D1.4
  Bottom 0.203: v44.19,55.31 46.23,55.31 46.23,41.4 45.72,40.89 37.08,40.89 36.32,40.13 36.32,33.53 34.54,31.75 31.75,31.75 v31.62,31.62
SD_CS  (via drill 0.35)
  Top 0.203: R26.1 22.45,28.45 21.97,28.93 21.97,32.64 21.47,33.14 J10.2 18.15,33.14 v18.03,33.02 | U2.23 53.09,51.31 v45.09,51.31
  Bottom 0.203: v45.09,51.31 35.69,51.31 35.43,51.05 35.43,33.66 34.54,32.77 18.29,32.77 v18.03,33.02
SD_IN  (via drill 0.35)
  Top 0.203: J10.CD 20.45,41.15 21.84,42.55 v21.97,42.55 | v36.96,55.63 36.96,57.12 U2.39
  Top 0.406: J10.CD 17.2,40.84 16.89,41.15 16.89,44.17 R22.2
  Bottom 0.203: v21.97,42.55 21.97,56.13 24.42,58.58 36.41,58.58 36.96,58.04 v36.96,55.63
SD_MISO
  Top 0.203: J10.7 20.48,38.61 21.72,38.61 22.1,38.99 22.1,40.26 22.48,40.64 R23.1 23.21,54.71 27.56,59.05 37.11,59.05 37.2,58.96 38.09,58.96 38.22,59.09 43.95,59.09 44.51,58.53 U2.33
SD_MOSI
  Top 0.203: J10.3 22.02,34.24 22.35,33.91 22.35,32.77 22.48,32.64 23.5,32.64 | U2.31 47.05,53.91 46.48,53.34 34.8,53.34 34.42,52.96 34.42,38.74 34.03,38.35 28.83,38.35 27.94,37.47 27.94,33.4 27.18,32.64 23.5,32.64 | R25.1 23.46,32.61 23.5,32.64
SD_SCK
  Top 0.203: J10.5 21.71,36.44 22.1,36.83 22.1,37.85 22.35,38.1 R24.1 24.13,39.02 24.13,54.61 27.83,58.31 33.42,58.31 34.58,57.15 34.58,54.19 34.93,53.84 45.4,53.84 45.84,54.28 45.84,56.59 45.78,56.64 U2.32
SHELL_GND
  pour Bottom: 0.85,52.91 7.04,52.91 7.04,61.39 0.84,61.39 0.84,52.92
TO_USB  (via drill 0.35)
  Top 0.203: v3.56,46.23 2.55,46.23 D13.C | U4.3 v17.53,56.52 | U2.37 39.43,56 v39.62,55.81
  Bottom 0.203: v3.56,46.23 16.89,46.23 17.53,46.86 v17.53,56.52 17.53,58.29 18.17,58.94 37.17,58.94 37.46,58.64 39.4,58.64 39.62,58.42 v39.62,55.81
(copper drawn outside any net)
  shapes: Bottom area x1

## Text on the board
tPlace: N | L | SPKR1 | SPKR2 | SPKR3 | 120-240 / VAC | CONFIG / 1) CONFIG MODE / 2) INVERT DOOR SW | RESET | DOOR1 | DOOR2 | DOOR3 | DOOR4 | DOOR5 | DOOR6
tNames: pwr | TX | SD-RDY | RX
bNames: VOX-DOOR-001 / PROTOTYPE 001 / 2024-10-27 / DESIGNED BY SOFTWARE-LOGISTICS